# EAGLE board H1DR1x-AD (EAGLE 9.6.1)
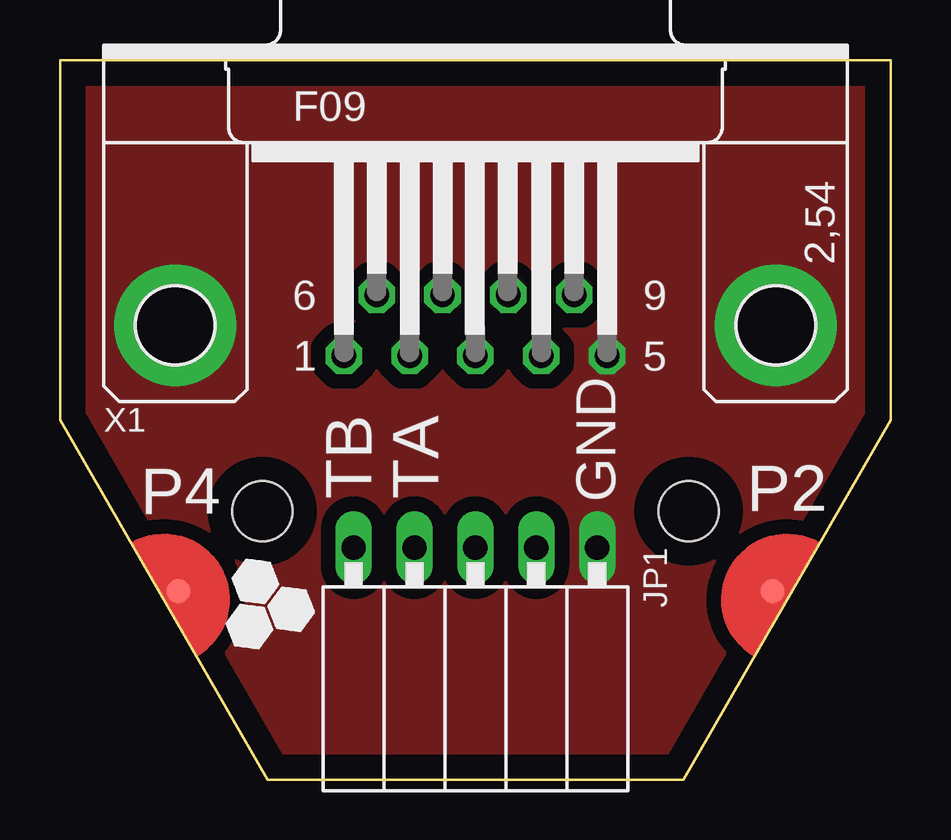
[diagram p0: board, top side]
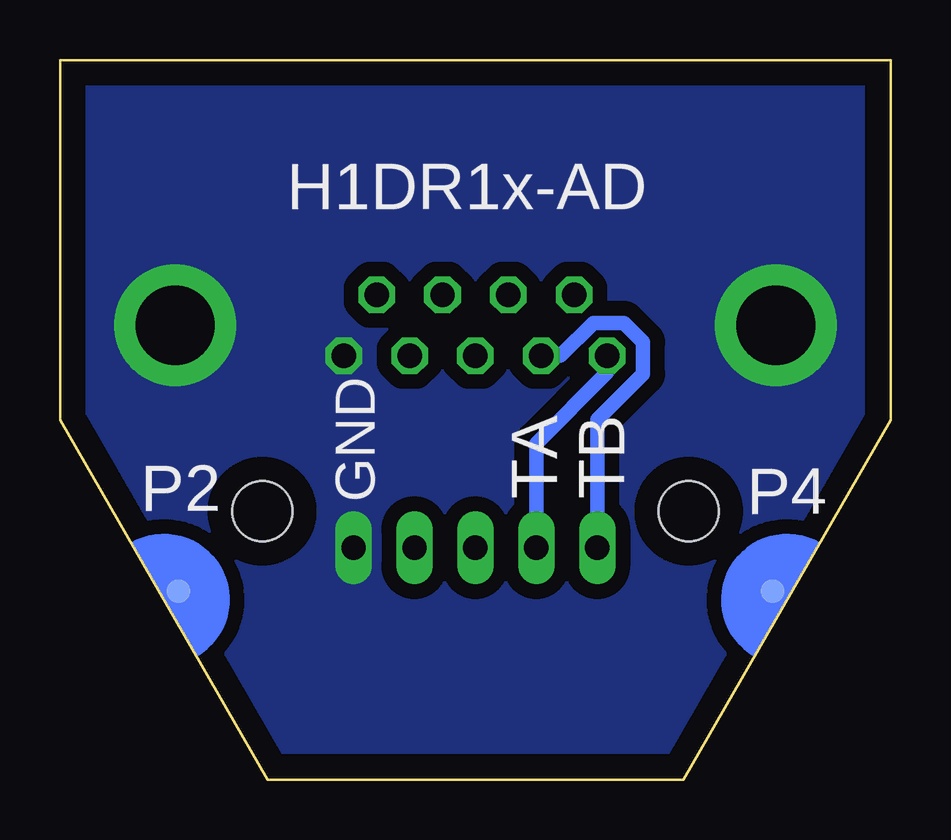
[diagram p1: board, bottom side, seen from below]

Size 34.64 x 30 mm. Coordinates in mm from the lower left corner, seen from the top.
Copper layers (1*16): Top 0.035mm / dielectric 0.15mm / Bottom 0.035mm
Design rules "default *": minimum track width 6mil, minimum drill 0.35mm, track to track 12mil, track to pad 12mil, pad to pad 6mil, via to via 6mil, smd to smd 6mil, copper to edge 40mil, drill to drill 6mil, minimum pad ring 10mil, minimum via ring 8mil, stop-mask expansion 4mil, vias tented up to drill 0mil, thermal gap 10mil

## Footprints (pad centres in the part's own frame; a part is rotated, then mirrored left to right if it is on the bottom)
F_1X05 = drill 1.016 long: 1 -5.08,-2.54; 2 -2.54,-2.54; 3 0,-2.54; 4 2.54,-2.54; 5 5.08,-2.54
HEXABIT_BUS_ADAPTER_WITH_P2_P4 = smd 1 x 1 bottom: PAD_PD2 12.39,-7.15; PAD_PD4 -12.39,-7.15 | smd 1 x 1: PAD_PU2 12.39,-7.15; PAD_PU4 -12.39,-7.15 | hole 2.5: -8.89,-3.81; 8.89,-3.81
F09HP = drill 1.016 octagon: 1 -5.486,-1.27; 2 -2.743,-1.27; 3 0,-1.27; 4 2.743,-1.27; 5 5.486,-1.27; 6 -4.115,1.27; 7 -1.372,1.27; 8 1.372,1.27; 9 4.115,1.27 | drill 3.302 pad 5.08: G1 -12.522,0; G2 12.522,0

## Placement (x,y rotation side)
JP1  [F_1X05]  17.32,7.13 180 top
U$1  HEXABIT_BUS_ADAPTER_WITH_PD2_PD4_PD9_PD10  [HEXABIT_BUS_ADAPTER_WITH_P2_P4]  17.32,15 0 top
X1  [F09HP]  17.32,18.94 0 top

## Library data of the parts
JP1 = Hexabitz; DESCRIPTION: Female, 5C, Rt Angle .100"CC; 3.15mm Tail, No Mt. 100u" Tin; PBT, Phos Bronze, 105 C; MFN: Sullins; MPN: PPTC051LGBN-RC; OCTOPART_URL: https://octopart.com/pptc051lgbn-rc-sullins-270345?r=sp
U$1 = hexabitz_connectors
X1 = Hexabitz; DESCRIPTION: 9 Position Dual Row Right Angle Through Hole Plug Male Pins D-Sub Connector; MFN: ASSMANN WSW Components; MPN: A-DS-09-A/KG-T2S; OCTOPART_URL: https://octopart.com/a-ds-09-a%2Fkg-t2s-assmann+wsw+components-56465222?r=sp; OC_FARNELL: unknown; OC_NEWARK: unknown

## Nets
CTS_OUT: X1.8
D-: JP1.4 X1.1
GND: JP1.1 X1.5 X1.G1 X1.G2
RTS_OUT: X1.7
RX_OUT: X1.3
TX_OUT/D+: JP1.5 X1.2

## Tracks (layer width: path | path; a pad name or v marks a point on that pad's centre or on a via)
D-
  Bottom 0.61: JP1.4 14.78,14.02 11.83,16.96 X1.1
GND
  pour Bottom (isolate 0.61, no thermals): -0.08,29.99 34.59,29.99 34.59,15.89 34.46,15.76 34.46,0.01 -0.08,0.01
  pour Top (isolate 0.61, no thermals): 0.05,29.99 34.72,29.99 34.72,0.01 0.05,0.01
TX_OUT/D+
  Bottom 0.61: JP1.5 12.24,15.01 10.33,16.92 10.33,18.23 11.14,19.04 12.4,19.04 13.77,17.67 X1.2

## Text on the board
tPlace: P4 | TB | TA | GND | P2
bPlace: H1DR1x-AD | P4 | TB | TA | GND | P2